# EAGLE board 2024 Face Avant 400i (3) (EAGLE 7.1.0)
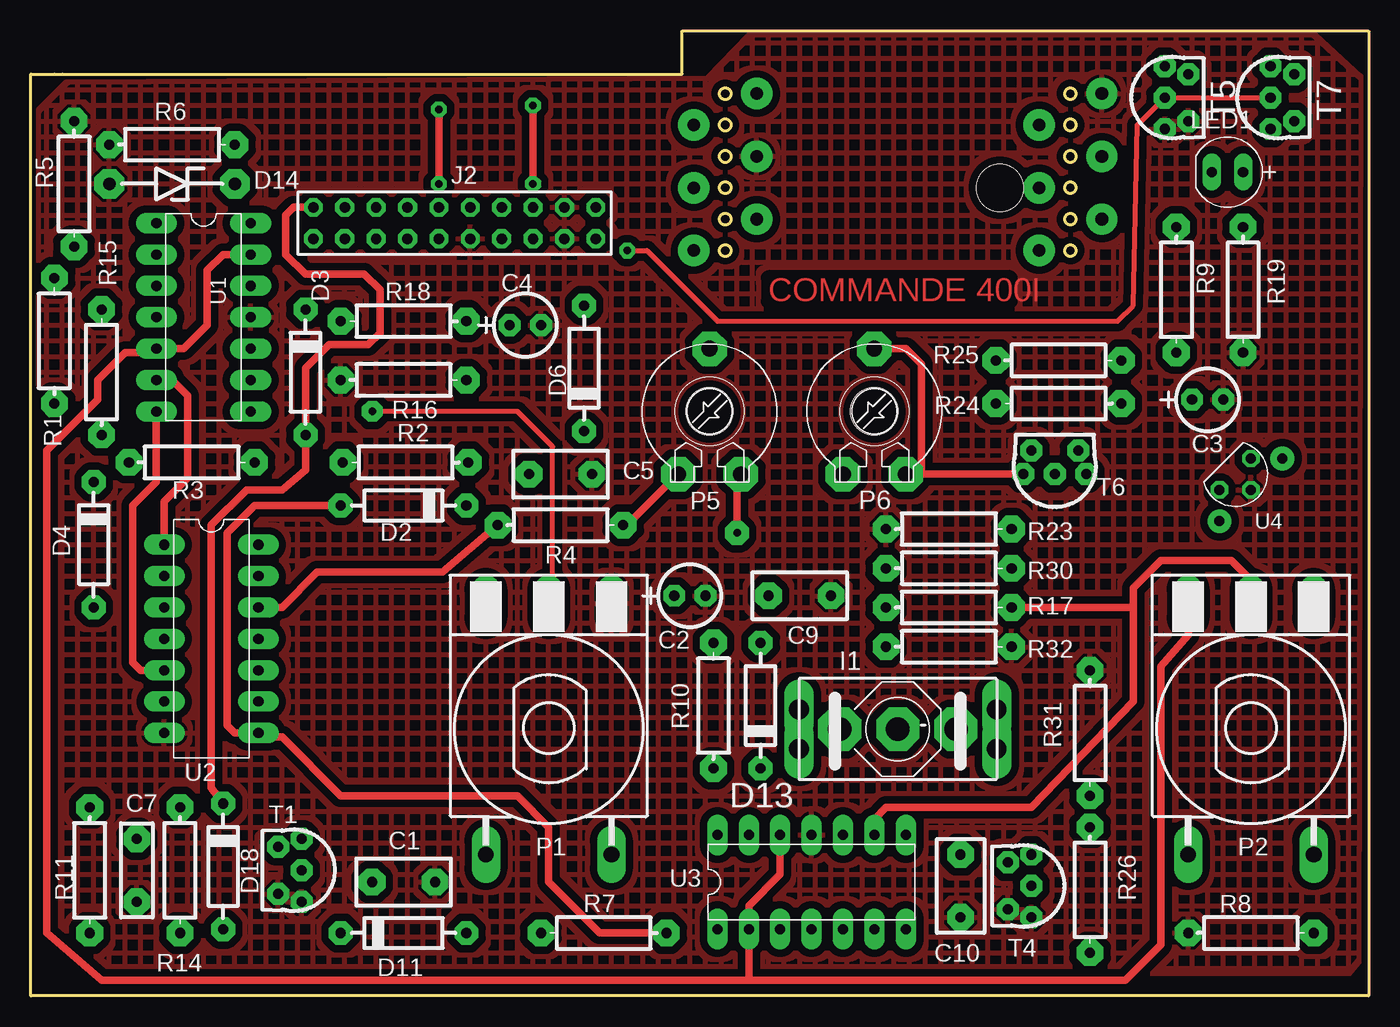
[diagram p0: board, top side]
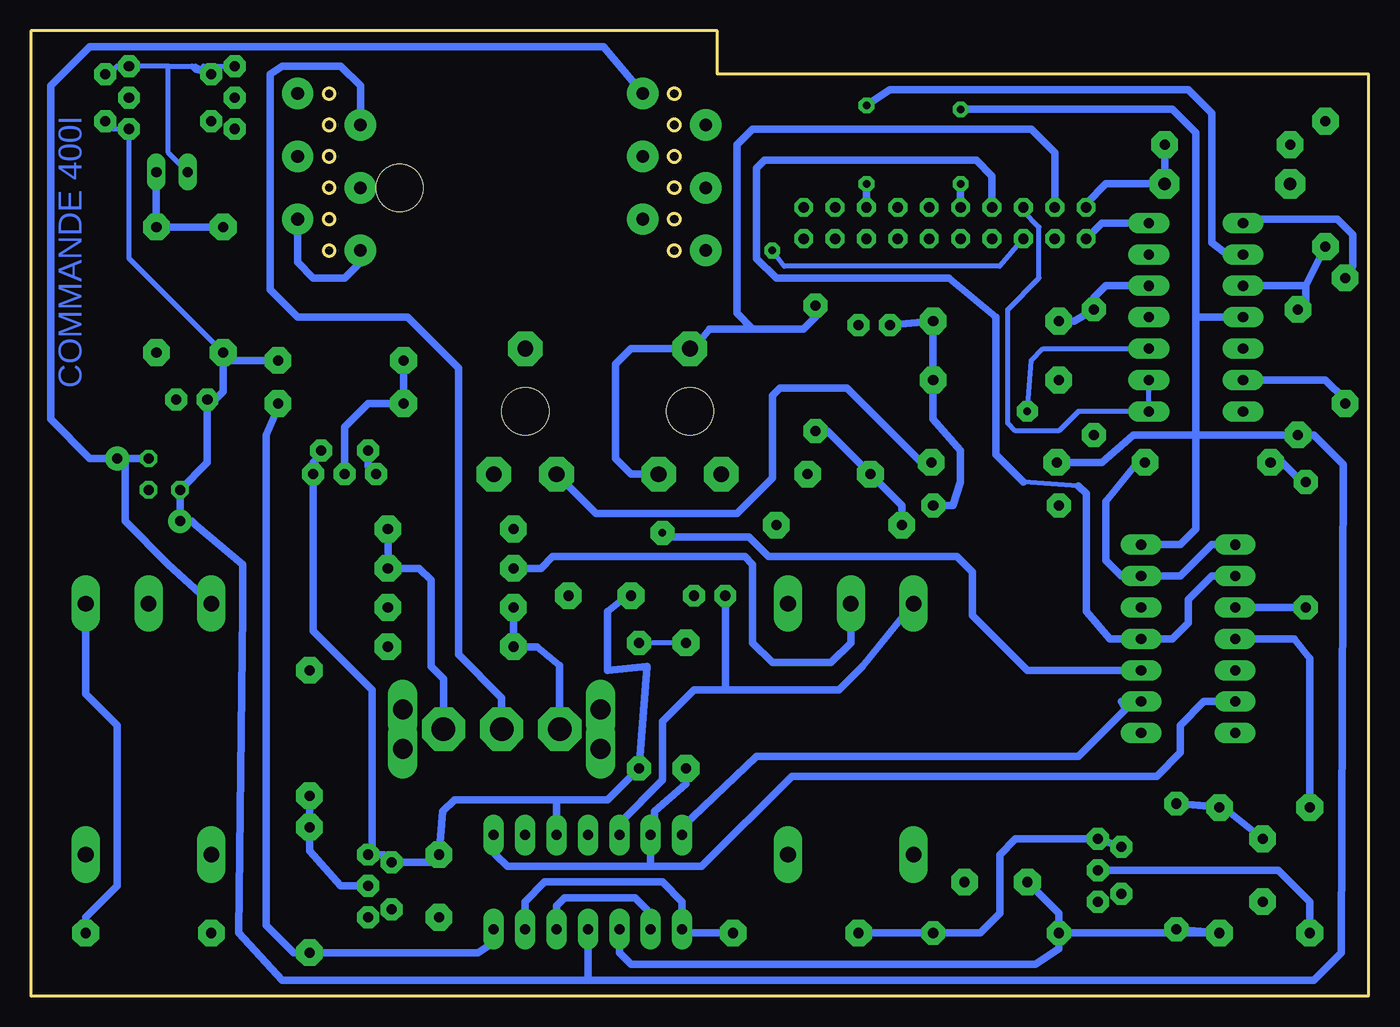
[diagram p1: board, bottom side, seen from below]

Size 108.27 x 78.11 mm. Coordinates in mm from the lower left corner, seen from the top.
Outline: 1.9,74.61 2.54,74.61
Outline: 2.54,74.61 52.71,74.61 52.71,78.11 108.27,78.11 108.27,0 0,0 0,74.61 2.54,74.61
Outline: circle at 56.2,73.03 radius 0.45
Outline: circle at 56.2,70.48 radius 0.45
Outline: circle at 56.2,67.95 radius 0.45
Outline: circle at 56.2,65.41 radius 0.45
Outline: circle at 56.2,62.87 radius 0.45
Outline: circle at 56.2,60.33 radius 0.45
Outline: circle at 84.14,73.03 radius 0.45
Outline: circle at 84.14,70.48 radius 0.45
Outline: circle at 84.14,67.95 radius 0.45
Outline: circle at 84.14,65.41 radius 0.45
Outline: circle at 84.14,62.87 radius 0.45
Outline: circle at 84.14,60.33 radius 0.45
Copper layers (1*16): Top 0.035mm / dielectric 1.5mm / Bottom 0.035mm
Design rules "default": minimum track width 10mil, minimum drill 24mil, track to track 8mil, track to pad 8mil, pad to pad 8mil, via to via 8mil, smd to smd 8mil, copper to edge 0mil, drill to drill 8mil, minimum pad ring 10mil, minimum via ring 8mil, stop-mask expansion 0mil, vias tented up to drill 0mil, thermal gap 10mil
Holes 1.02 mm at 56.2,73.03 56.2,70.48 56.2,67.95 56.2,65.41 56.2,62.87 56.2,60.33 84.14,73.03 84.14,70.48 84.14,67.95 84.14,65.41 84.14,62.87 84.14,60.33
Holes 3.81 mm at 78.42,65.41 68.26,47.31 54.93,47.31

## Footprints (pad centres in the part's own frame; a part is rotated, then mirrored left to right if it is on the bottom)
C-5L = drill 0.813 pad 2.159 octagon: 1 5.08,0; 2 0,0
02P000RA = drill 0.813 pad 1.778 octagon: N 2.54,0; P 0,0
C-5 = drill 0.813 pad 2.159 octagon: 1 5.08,0; 2 0,0
D-10 = drill 0.813 pad 1.93 octagon: A -5.08,0; K 5.08,0
ZDIO-10 = drill 1.016 pad 2.413 octagon: A -5.08,0; K 5.08,0
INTER = drill 1.9 pad 3.5 octagon: 1 0,-4.7; 2 0,0; 3 0,4.7 | drill 1.6 pad 1.9 long: P$1 1.6,8; P$2 -1.6,8; P$3 -1.6,-8; P$4 1.6,-8
CON10X2 = drill 0.838 pad 1.524 octagon: 1 0,0; 2 0,2.54; 3 2.54,0; 4 2.54,2.54; 5 5.08,0; 6 5.08,2.54; 7 7.62,0; 8 7.62,2.54; 9 10.16,0; 10 10.16,2.54; 11 12.7,0; 12 12.7,2.54; 13 15.24,0; 14 15.24,2.54; 15 17.78,0; 16 17.78,2.54; 17 20.32,0; 18 20.32,2.54; 19 22.86,0; 20 22.86,2.54
LEDV = drill 0.813 pad 1.5 long: A -1.27,0; K 1.27,0
POT_NEW = drill 1.27 pad 2.286 long: 1 -5.08,-10.16; 2 5.08,-10.16; P$1 5.08,10.16; P$2 -5.08,10.16; S 0,-10.16
PT-10 = drill 1.27 pad 2.794 octagon: 1 -2.54,-5.08; 2 2.54,-5.08; 3 0,5.08
R-10 = drill 0.813 pad 2.159 octagon: 1 -5.08,0; 2 5.08,0
TO92_L = drill 0.813 pad 1.778 octagon: 1 0,0; 2 1.905,1.905; 3 3.81,0; 4 -0.635,1.905; 5 4.445,1.905
DIL-14 = drill 0.813 pad 1.676 long: 1 -7.62,-3.81; 2 -5.08,-3.81; 3 -2.54,-3.81; 4 0,-3.81; 5 2.54,-3.81; 6 5.08,-3.81; 7 7.62,-3.81; 8 7.62,3.81; 9 5.08,3.81; 10 2.54,3.81; 11 0,3.81; 12 -2.54,3.81; 13 -5.08,3.81; 14 -7.62,3.81
DIL-14' = drill 0.813 pad 1.651 long: 1 -7.62,-3.81; 2 -5.08,-3.81; 3 -2.54,-3.81; 4 0,-3.81; 5 2.54,-3.81; 6 5.08,-3.81; 7 7.62,-3.81; 8 7.62,3.81; 9 5.08,3.81; 10 2.54,3.81; 11 0,3.81; 12 -2.54,3.81; 13 -5.08,3.81; 14 -7.62,3.81
TO-92A = drill 0.813 pad 1.397 octagon: 1 -1.27,1.27; 2 1.27,1.27; 3 1.27,-1.27
PAST = drill 0.813 pad 1.93: 1 0,0
PAST_1,0 = drill 1.016 pad 2.54: 1 0,0

## Placement (x,y rotation side)
C1  470n  [C-5L]  27.62,9.21 0 top
C2  22µF  [02P000RA]  52.07,32.39 0 top
C3  22uF  [02P000RA]  93.98,48.26 0 top
C4  22µF  [02P000RA]  38.73,54.29 0 top
C5  470nF  [C-5L]  45.4,42.23 180 top
C7  10n  [C-5]  8.57,12.7 270 top
C9  0.47µ  [C-5L]  64.77,32.39 180 top
C10  0.47µ  [C-5L]  75.25,6.35 90 top
D2  [D-10]  30.16,39.69 0 top
D3  [D-10]  22.23,50.48 90 top
D4  BAV21  [D-10]  5.08,36.51 90 top
D6  BAV21  [D-10]  44.77,50.8 270 top
D11  BAV21  [D-10]  30.16,5.08 180 top
D13  1N4148  [D-10]  59.05,23.49 270 top
D14  12V  [ZDIO-10]  11.43,65.72 0 top
D18  BAV 21  [D-10]  15.56,10.48 90 top
I1  [INTER]  70.17,21.59 270 top
J2  [CON10X2]  22.86,61.28 0 top
LED1  ORANGE  [LEDV]  96.84,66.67 180 top
P1  10K  [POT_NEW]  41.91,21.59 180 top
P2  10K  [POT_NEW]  98.74,21.59 180 top
P5  100K  [PT-10]  54.93,47.31 0 top
P6  100K  [PT-10]  68.26,47.31 0 top
R1  47k  [R-10]  1.9,53.02 90 top
R2  100K  [R-10]  30.32,43.18 180 top
R3  4.7k  [R-10]  13.02,43.18 0 top
R4  47k  [R-10]  42.86,38.1 0 top
R5  10K  [R-10]  3.49,65.72 270 top
R6  22k  [R-10]  11.43,68.9 0 top
R7  10k  [R-10]  46.35,5.08 180 top
R8  470  [R-10]  98.74,5.08 0 top
R9  2.2K  [R-10]  92.71,57.15 270 top
R10  1M  [R-10]  55.25,23.49 90 top
R11  10k  [R-10]  4.76,10.16 270 top
R14  2.2M  [R-10]  12.07,10.16 270 top
R15  47K  [R-10]  5.71,50.48 90 top
R16  100K  [R-10]  30.16,49.85 0 top
R17  47K  [R-10]  74.3,31.43 0 top
R18  100K  [R-10]  30.16,54.61 180 top
R19  2.2K  [R-10]  98.11,57.15 270 top
R23  390  [R-10]  74.29,37.78 0 top
R24  10k  [R-10]  83.18,47.94 180 top
R25  1K  [R-10]  83.18,51.44 0 top
R26  47k  [R-10]  85.72,8.57 270 top
R30  47K  [R-10]  74.3,34.61 0 top
R31  10K  [R-10]  85.72,21.27 270 top
R32  1K  [R-10]  74.3,28.26 0 top
T1  BC547  [TO92_L]  20,12.06 270 top
T4  [TO92_L]  79.06,10.79 270 top
T5  [TO92_L]  93.66,70.8 90 top
T6  pnp  [TO92_L]  84.77,44.13 180 top
T7  [TO92_L]  102.23,70.8 90 top
U1  LM324  [DIL-14]  13.97,54.93 270 top
U2  4081  [DIL-14']  14.61,28.89 270 top
U3  [DIL-14]  63.18,9.21 0 top
U4  LM78L05  [TO-92A]  97.47,42.23 270 top
U$29  [PAST]  96.2,38.42 90 top
U$31  [PAST]  101.28,43.5 90 top
U$32  [PAST_1,0]  53.66,70.48 0 top
U$33  [PAST_1,0]  58.74,73.03 0 top
U$34  [PAST_1,0]  58.74,67.95 0 top
U$35  [PAST_1,0]  53.66,65.41 0 top
U$36  [PAST_1,0]  58.74,62.87 0 top
U$37  [PAST_1,0]  53.66,60.33 0 top
U$38  [PAST_1,0]  86.68,62.87 0 top
U$39  [PAST_1,0]  81.6,60.33 0 top
U$40  [PAST_1,0]  81.6,65.41 0 top
U$41  [PAST_1,0]  86.68,67.95 0 top
U$42  [PAST_1,0]  81.6,70.48 0 top
U$43  [PAST_1,0]  86.68,73.03 0 top

## Library data of the parts
C1 C3 C7 = C
C2 C4 C5 C9 C10 D2 D3 D13 R2 R5 R8 R9 R15-R19 R23-R26 R30-R32 = passif
D4 D6 D11 D14 D18 LED1 P5 P6 R1 R3 R4 R6 R7 R10 R11 R14 = DISCRETE
I1 = special
J2 = CONNECT1
P1 P2 = R
T1 T4-T7 = TRANS1
U1 U3 U4 = linear
U2 = 40XX
U$29 U$31-U$43 = PAST

## Nets
+5V: C2.P P1.2 P2.2 U1.5 U1.13 U3.2 U3.5 U3.12 U4.1 U$31.1 U$33.1
+12V: C3.P J2.10 R2.2 R9.2 R15.1 R25.2 T7.1 T7.4 U1.4 U2.14 U3.4 U4.3 U$29.1
BLOC: J2.8 U2.2 U2.11
BOBINE: D6.A J2.4 P5.2 P5.3 U2.10
CONS: J2.6 U1.8 U1.9
DEF: J2.5 T5.2 T7.2
EV: J2.1 U1.14
GACH: C7.2 D3.A D14.K D18.K J2.2 R6.2 R14.1
GND: C1.1 C2.N C3.N C4.N C5.2 C7.1 C9.2 C10.2 D14.A J2.11 J2.17 J2.18 P1.1 R5.1 R6.1 R8.1 R16.1 R19.2 R23.1 R31.1 R32.2 T1.3 T1.5 T4.3 T4.5 T5.1 T5.4 U1.11 U2.7 U3.11 U4.2 U$34.1 U$43.1
N$1: LED1.K T5.3 T5.5 T7.3 T7.5
N$2: LED1.A R9.1 R19.1
N$4: R5.2 R15.2 U1.3
N$6: I1.1 R17.1 R32.1
N$7: P1.S R30.1 U1.10
N$8: D2.A R7.1 U2.8 U3.1 U3.6
N$9: R1.2 U1.1
N$10: R1.1 R3.2 U1.6 U2.1 U2.13
N$13: D4.A U2.3
N$14: D4.K R3.1
N$16: C9.1 C10.1 D13.K T4.1 T4.4 T6.1 T6.4 U3.10
N$17: C5.1 D6.K R4.1 U2.12
N$18: C4.P D2.K R16.2 R18.1
N$20: D3.K R18.2 U1.12
N$21: P6.1 R2.1
N$22: P6.2 P6.3 T6.3 T6.5
N$24: D11.A R7.2 T1.1 T1.4
N$25: R10.1 U2.6 U3.8 U3.13
N$26: U2.9 U3.14
N$27: R11.2 T1.2
N$28: R11.1 U2.4
N$29: U1.7 U2.5
N$30: I1.3 R23.2 R30.2
N$33: C1.2 D11.K D18.A R14.2 U3.3
N$39: P2.1 R8.2
N$41: P5.1 R4.2
N$42: D13.A R10.2
N$43: R24.1 R26.2 U3.7
N$44: P2.S R17.2 U3.9
N$45: R26.1 R31.2 T4.2
N$46: R24.2 R25.1 T6.2
N$48: I1.2 U$42.1
N$49: U$38.1 U$39.1
TENSION: J2.16 U1.2

## Tracks (layer width: path | path; a pad name or v marks a point on that pad's centre or on a via)
+5V
  Top 0.61: U3.12 60.64,9.84 58.1,7.3 U3.2 58.1,1.27 | 58.1,1.27 5.71,1.27 1.27,5.08 1.27,44.13 5.4,48.26 5.4,49.85 7.62,52.07 9.53,52.07 9.84,52.39 U1.5 12.38,52.39 14.29,54.29 14.29,58.74 15.56,60.01 U1.13 | 58.1,1.27 88.58,1.27 91.44,4.13 91.44,26.67 93.66,29.21 P2.2
  Bottom 0.61: U3.2 58.1,6.67 59.37,7.94 65.09,7.94 65.72,7.3 U3.5 | 100.65,43.5 U$31.1 103.5,43.5 106.68,46.67 106.68,73.66 103.5,76.84 61.91,76.84 U$33.1 | 100.65,43.5 U4.1 | P1.2 40.96,26.67 42.86,24.76 52.07,24.76 | 52.07,24.76 54.61,24.76 57.15,22.22 57.15,17.46 60.64,13.97 U3.12 | P2.2 97.16,34.93 100.65,38.42 100.65,43.5 | 52.07,24.76 C2.P
+12V  (via drill 0.61 pad 1.27)
  Top 0.61: v33.02,71.75 v33.02,65.72
  Bottom 0.406: 5.87,45.4 R15.1 5.87,45.4 | 5.87,45.4 | R9.2 100.33,59.69 T7.4 101.6,70.17 T7.1
  Bottom 0.61: 13.97,54.93 U1.4 | 13.97,45.4 13.97,54.93 | 5.87,45.4 R15.1 | R15.1 13.97,45.4 | U2.14 15.24,36.51 13.97,37.78 13.97,45.4 | R2.2 21.59,43.18 19.05,45.4 13.97,45.4 | v33.02,65.72 J2.10 | v33.02,71.75 15.88,71.75 13.97,69.85 13.97,54.93 | R15.1 | R15.1 4.45,45.4 2.06,43.02 2.22,3.49 4.45,1.27 63.18,1.27 | 63.18,1.27 U3.4 | 63.18,1.27 87.95,1.27 91.44,5.08 91.12,31.11 91.12,34.93 94.93,38.1 95.25,38.42 U$29.1 | U$29.1 U4.3 | U$29.1 U4.3 | R25.2 92.07,51.43 R9.2 92.71,48.9 93.34,48.26 C3.P 93.98,43.18 U4.3
BLOC
  Bottom 0.406: 18.1,28.89 U2.11 | U2.11 | U2.11 19.05,28.89 | 23.5,41.28 27.94,41.59
  Bottom 0.61: J2.8 30.48,66.36 31.75,67.63 48.9,67.63 49.53,66.99 49.53,59.69 47.94,58.1 33.97,58.1 30.16,54.93 30.16,43.82 27.94,41.59 | U2.2 12.7,33.97 14.61,32.07 14.61,30.16 15.88,28.89 18.1,28.89 U2.11 | 18.73,28.89 19.05,28.89 20.95,28.89 22.86,31.11 22.86,40.64 23.5,41.28
BOBINE  (via drill 0.61 pad 1.93)
  Top 0.61: P5.2 57.47,41.91 57.15,41.59 v57.15,37.47
  Bottom 0.61: J2.4 25.4,68.26 27.3,70.17 49.85,70.17 51.12,68.9 51.12,55.25 49.85,53.97 | D6.A 44.77,54.93 45.72,53.97 49.85,53.97 | 49.85,53.97 53.34,53.97 54.61,52.39 P5.3 59.69,52.39 60.96,51.12 60.96,43.5 59.69,42.23 58.42,42.23 58.1,42.54 57.79,42.23 P5.2 | U2.10 27.62,26.35 32.07,30.8 32.07,34.29 33.34,35.56 48.58,35.56 50.16,37.15 56.83,37.15 v57.15,37.47
CONS
  Bottom 0.406: U1.8 U1.9 U1.8 | U1.8 23.5,47.31 25.08,45.72 28.58,45.72 29.21,46.36 29.21,55.56 26.67,58.1 26.67,62.23 27.94,63.5 J2.6
DEF  (via drill 0.61 pad 1.27)
  Top 0.406: 51.75,58.42 55.56,54.61 87.95,54.61 89.22,55.88 89.53,70.48 T5.2 T7.2 | 51.75,58.42 51.44,58.74 | v48.26,60.33 49.85,60.33 51.75,58.42
  Bottom 0.406: J2.5 29.84,59.05 47.31,59.05 v48.26,60.33
EV
  Bottom 0.61: U1.14 21.59,62.55 J2.1
GACH
  Top 0.61: D18.K 14.61,16.83 14.61,38.1 17.46,40.96 20.32,40.96 22.23,42.54 D3.A 22.23,50.8 24.13,52.71 27.3,52.71 28.26,53.66 28.26,57.15 26.99,58.42 22.23,58.42 20.64,60.01 20.64,63.18 21.27,63.82 J2.2
  Bottom 0.61: R6.2 D14.K 21.27,65.72 22.86,64.14 22.54,64.14 J2.2 | C7.2 11.75,15.24 D18.K R14.1
GND
  pour Top (isolate 0.6, hatched): 2.86,73.98 54.77,74.3 58.1,77.79 103.98,77.79 107.63,74.45 107.47,2.7 106.68,1.75 2.22,1.9 0.63,3.17 0.63,71.75
N$1
  Bottom 0.406: T5.5 94.3,75.25 T5.3 | T5.3 94.93,75.25 95.25,75.25 | 97.16,75.25 T7.5 101.28,75.25 101.92,74.61 T7.3 | T5.3 94.93,74.93 95.25,75.25 | 97.16,75.25 95.25,75.25 | 97.16,75.25 97.16,68.26 LED1.K
N$2
  Bottom 0.61: R9.1 R19.1 98.11,66.36 97.79,66.67 LED1.A
N$4
  Bottom 0.61: 5.08,57.47 U1.3 | 5.08,57.47 R5.2 | R15.2 5.08,55.56 5.08,57.47
N$6
  Bottom 0.61: R17.1 R32.1 67.31,28.26 65.47,26.73 I1.1
N$7  (via drill 0.61 pad 1.68)
  Top 0.406: v27.62,47.31 39.37,47.31 42.23,44.45 42.23,33.97
  Top 0.61: P1.S 41.91,33.65 42.23,33.97
  Bottom 0.406: U1.10 26.35,52.39 27.3,51.43 v27.62,47.31
  Bottom 0.61: R30.1 66.99,34.61 66.04,35.56 50.48,35.56 49.85,34.93 49.85,28.58 48.26,26.99 43.5,26.99 41.91,28.58 P1.S
N$8
  Top 0.61: D2.A 18.1,39.69 15.88,37.47 15.88,21.91 16.51,21.27 18.1,21.27 | 18.1,21.27 18.41,20.95 20.32,20.95 25.08,16.19 39.37,16.19 41.91,13.65 41.91,9.21 46.04,5.08 R7.1 | 18.1,21.27 U2.8
  Bottom 0.61: U3.6 68.26,7.62 66.67,9.21 57.15,9.21 55.56,7.62 U3.1 55.25,5.08 R7.1
N$9
  Bottom 0.406: U1.1 10.32,62.55
  Bottom 0.61: U1.1 9.53,62.55 9.21,62.87 2.54,62.87 1.27,61.59 1.27,59.05 R1.2
N$10
  Top 0.61: U2.1 10.79,40.01 12.7,41.91 12.7,48.58 11.43,49.85 U1.6
  Bottom 0.61: U1.6 3.49,49.85 1.9,48.26 R1.1 | R3.2 18.73,43.18 21.27,40.01 21.27,35.24 20,33.97 U2.13 15.24,33.97 12.7,36.51 U2.1
N$13
  Bottom 0.61: D4.A U2.3
N$14
  Bottom 0.61: D4.K 5.08,41.28 6.98,43.18 R3.1
N$16
  Bottom 0.61: C9.1 60.01,32.39 61.59,31.11 61.59,26.35 58.42,26.67 D13.K 61.59,15.88 65.72,15.88 | T6.1 84.77,43.82 85.41,43.18 T6.4 85.41,29.53 80.64,24.76 80.64,11.75 T4.4 79.69,11.43 T4.1 75.88,10.79 C10.1 74.93,14.92 73.98,15.88 65.72,15.88 | U3.10 65.72,15.88
N$17
  Top 0.61: U2.12 20.32,31.43 23.18,34.29 33.34,34.29 R4.1
  Bottom 0.61: R4.1 37.78,39.69 C5.1 43.81,45.72 D6.K
N$18
  Bottom 0.61: D2.K 33.66,39.69 33.02,41.59 33.02,44.13 35.24,46.67 R16.2 R18.1 C4.P
N$20
  Bottom 0.61: U1.12 21.27,57.47 22.23,56.51 D3.K 23.81,54.61 R18.2
N$21
  Bottom 0.61: 65.41,41.91 P6.1 62.55,39.05 51.12,39.05 48.26,41.91 48.26,48.58 47.62,49.21 42.23,49.21 36.2,43.18 R2.1
N$22
  Top 0.61: P6.3 70.8,52.39 72.07,51.12 72.07,42.54 71.75,42.23 P6.2 T6.5
  Bottom 0.61: T6.3 80.96,42.86 T6.5
N$24
  Bottom 0.61: T1.1 T1.4 28.58,12.7 29.84,11.43 29.84,6.67 31.43,5.08 D11.A R7.2 41.59,5.08
N$25
  Bottom 0.406: 58.1,10.48 U3.13 | 70.64,12.54 | 70.64,12.54 U3.8
  Bottom 0.61: 58.1,10.48 | 58.1,10.48 69.69,10.48 70.64,11.43 70.64,12.54 | U2.6 13.34,23.81 15.24,21.91 15.24,19.68 17.14,17.78 46.67,17.78 53.98,10.48 58.1,10.48 | 58.1,10.48 U3.13 57.79,12.7 57.79,14.92 55.25,17.15 R10.1 | U3.8 70.48,12.06
N$26
  Bottom 0.61: U2.9 20,23.81 19.69,23.18 23.5,19.37 49.53,19.37 55.56,13.65 U3.14 55.88,12.38
N$27
  Bottom 0.61: R11.2 4.76,7.62 7.3,10.16 T1.2
N$28
  Bottom 0.61: R11.1 4.76,27.31 6.03,28.89 U2.4
N$29
  Top 0.61: U1.7 10.16,41.59 8.25,39.69 8.25,26.99 8.89,26.35 U2.5
N$30
  Bottom 0.61: R23.2 79.38,36.83 79.38,36.19 R30.2 76.83,34.61 75.88,33.65 75.88,26.67 74.87,25.65 I1.3
N$33
  Bottom 0.61: D18.A R14.2 D11.K | U3.3 60.64,3.49 59.69,2.54 26.99,2.54 25.08,3.81 D11.K | C1.2 25.08,6.67 D11.K
N$39
  Bottom 0.61: P2.1 103.82,24.45 101.28,21.91 101.28,8.89 103.82,6.35 R8.2
N$41
  Top 0.61: R4.2 48.26,38.1 P5.1
N$42
  Bottom 0.406: R10.2 D13.A
N$43
  Bottom 0.61: U3.7 70.8,4.44 71.12,4.13 72.07,3.49 R26.2 86.99,3.49 89.22,5.71 89.22,45.4 88.27,47.62 R24.1
N$44
  Top 0.61: U3.9 68.26,14.29 69.22,15.24 80.96,15.24 89.22,23.81 89.22,33.02 | 89.22,33.02 89.22,31.43 R17.2 | 89.22,33.02 91.44,35.24 97.16,35.24 98.74,33.65 P2.S
N$45
  Bottom 0.61: R31.2 R26.1 85.72,11.75 83.18,8.89 T4.2
N$46
  Bottom 0.61: R24.2 78.42,48.26 | R24.2 R25.1 | T6.2 82.87,46.04 80.96,47.94 R24.2
N$48
  Bottom 0.61: I1.2 70.17,24.13 73.66,27.62 73.66,50.8 77.79,54.93 86.68,54.93 88.9,57.15 88.9,74.61 87.95,75.25 83.18,75.25 81.6,73.66 U$42.1
N$49
  Bottom 0.61: U$39.1 81.6,59.37 82.87,58.1 85.41,58.1 86.68,59.37 U$38.1
TENSION  (via drill 0.61 pad 1.27)
  Top 0.61: v40.64,72.07 v40.64,65.72
  Bottom 0.61: v40.64,72.07 38.73,73.34 14.61,73.34 12.7,71.44 12.7,60.96 11.43,60.01 U1.2 | v40.64,65.72 J2.16

## Text on the board
Top: COMMANDE 400I
Bottom: COMMANDE 400I
tValues: J4 | J3